# Altium PCB PCB1.PcbDoc (part 2 of 2)
Units mil, origin at the board's own origin, x right, y up, seen from the top; angles counter-clockwise.
Board outline 6000 x 4000 mil, 2 copper layers (Top Layer, Bottom Layer); 288 components, 201 nets, 886 pads, 6 vias.
Unrouted connection lines stored in the file: 611.
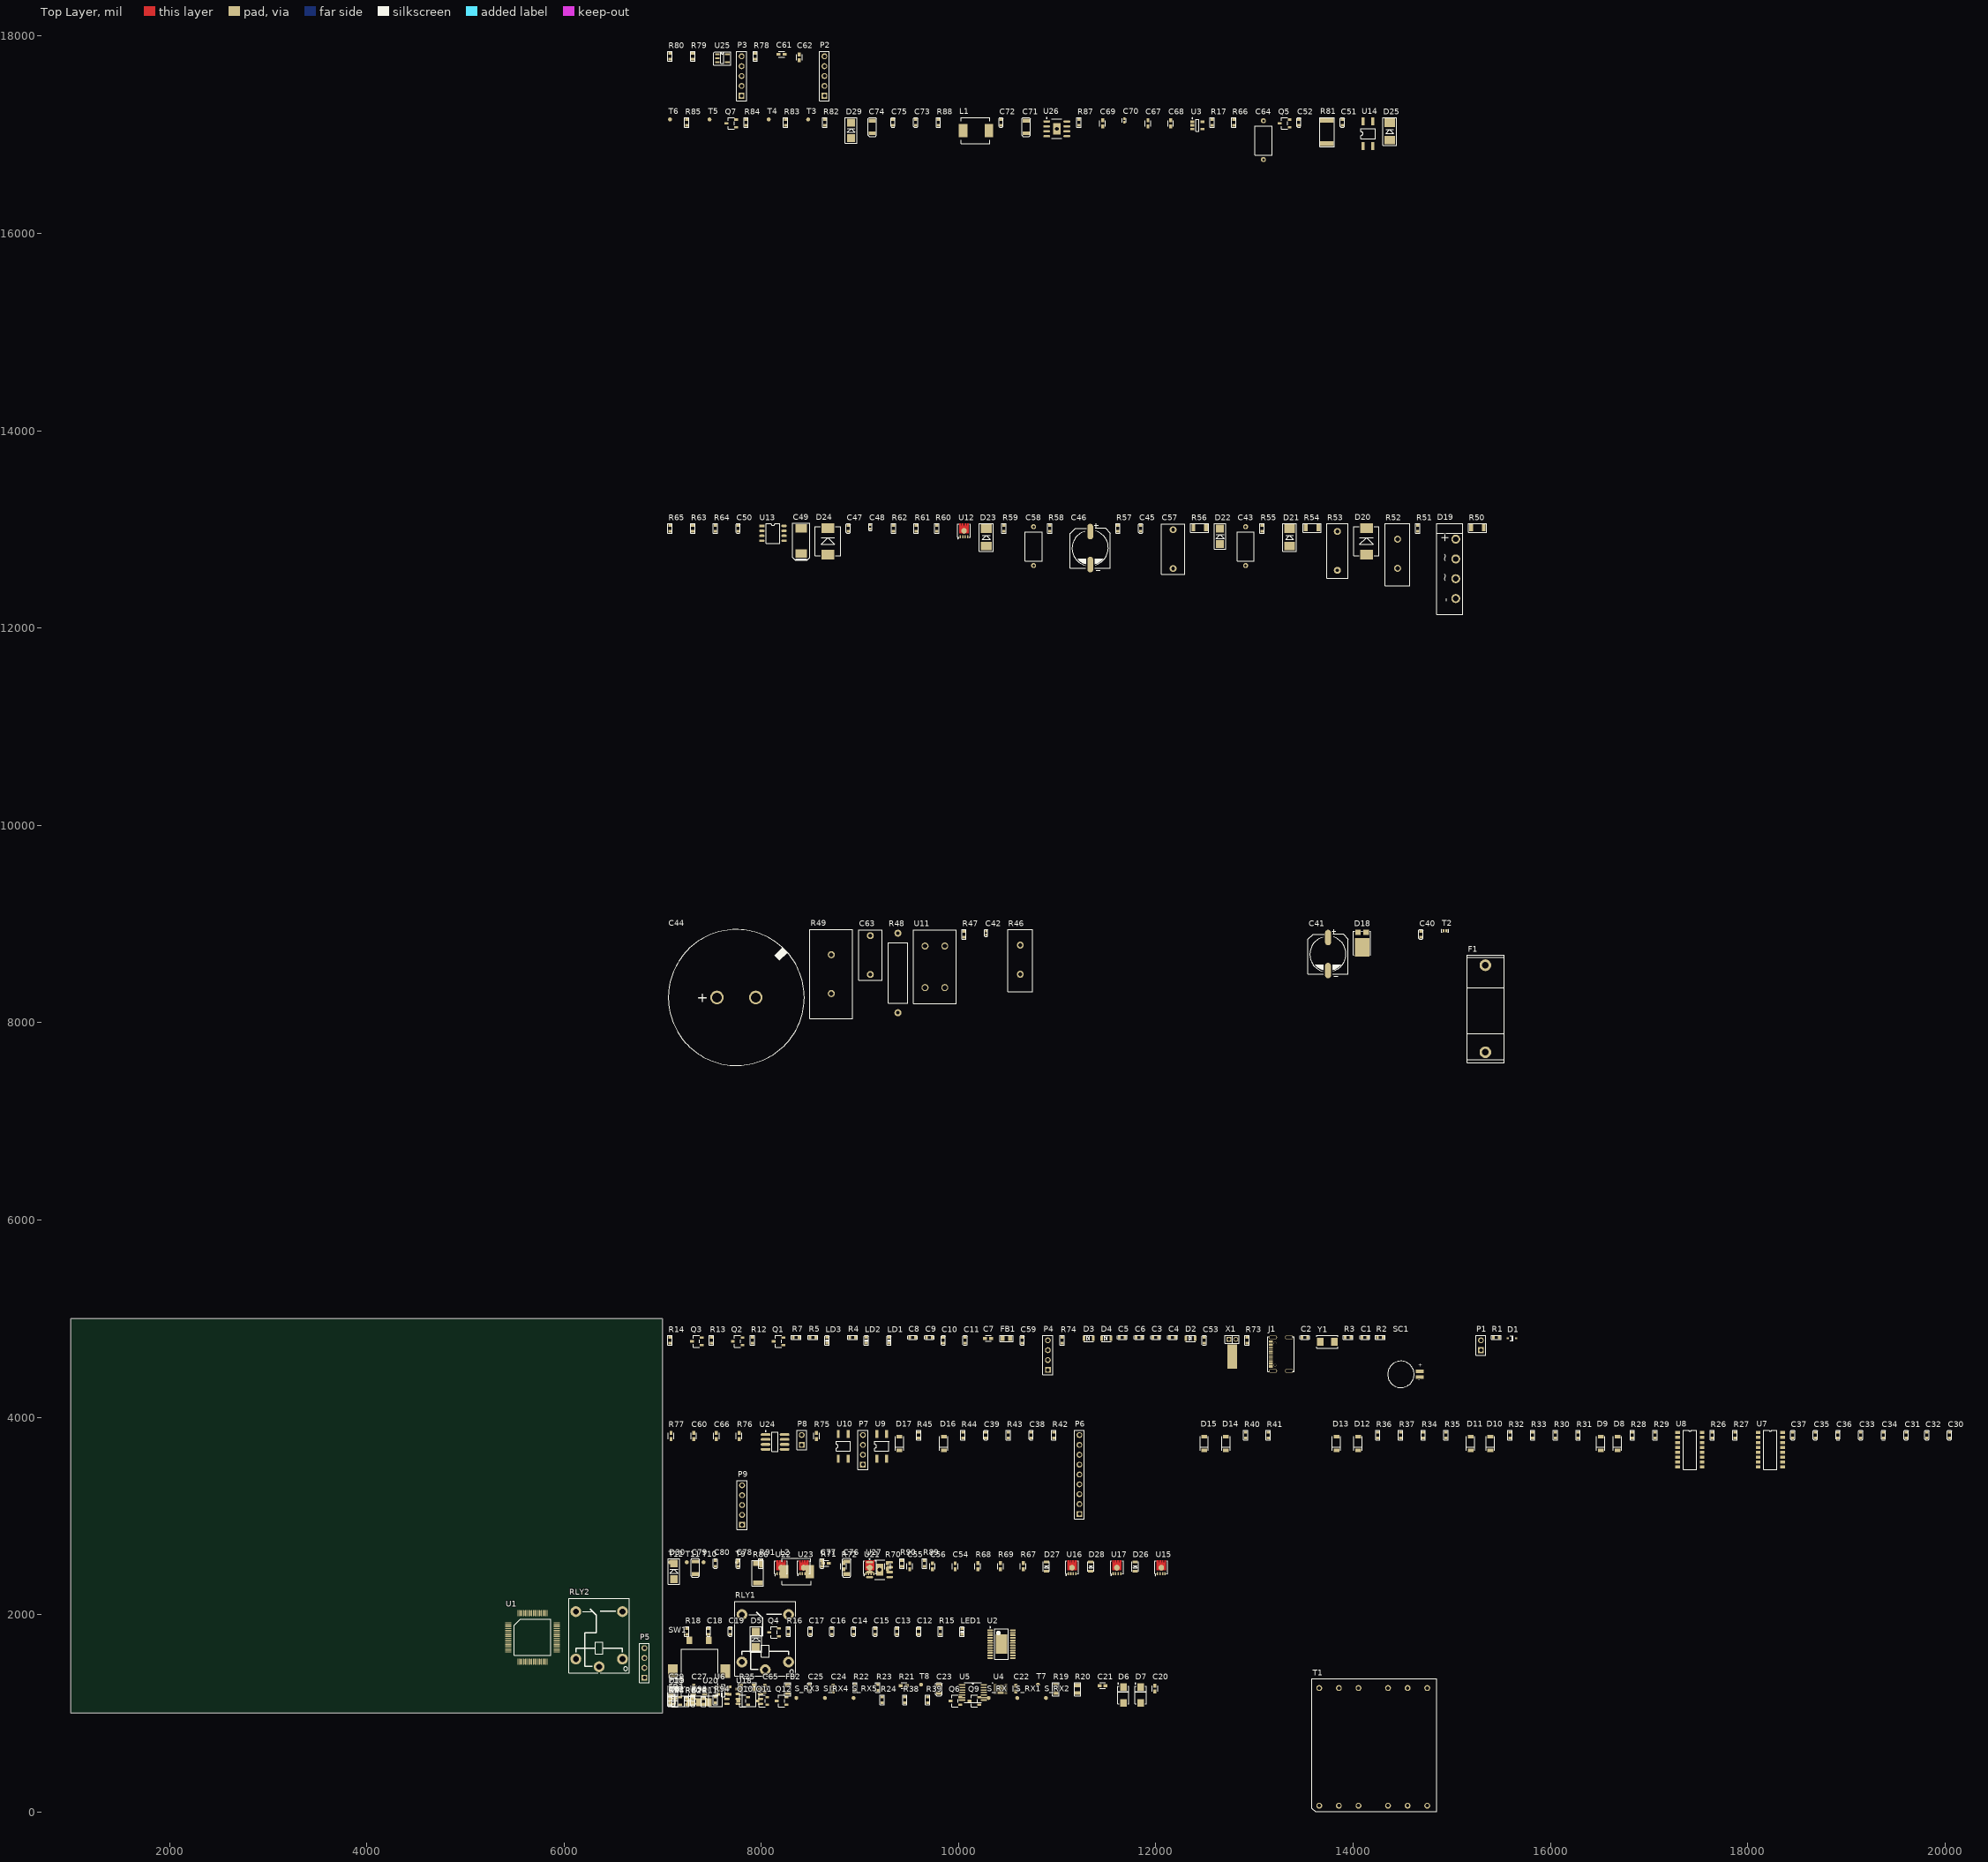
[diagram p0: Top Layer view]

## Via types
v1: diameter 24, hole 12, Top Layer to Bottom Layer, 4 vias
v2: diameter 59.06, hole 39.37, Top Layer to Bottom Layer, 2 vias

## Nets (pads, with @x,y where several pads share a name; then routed paths per layer and width w, separated by ;. In a path a pad name is that pad's centre, name@x,y a point inside that pad or via, vN(x,y) a via of type N, cw(c..) or ccw(c..) an arc to the next point about the centre after c; other vN are vias at no path point) (continued)
NetC40_1: C40.1 C41.1 D18.3 R61.1 R64.1 T2.1
NetC42_1: C42.1 C44.1 D19.1 R47.2 R50.2 T1.1
NetC42_2: C42.2 R51.2
NetC45_1: C45.1 C49.1 D21.2 R56.1 U13.6
NetC46_1: C46.1 D22.2 R55.1 R57.1
NetC47_1: C47.1 U13.1
NetC48_1: C48.1 D24.2 R61.2 R63.1
NetC50_1: C50.1 U13.2 U14.4
NetC51_1: C51.1 D25.2 R62.2 U13.3
NetC52_1: C52.1 Q5.2 R65.2 U14.2
NetC52_2: C52.2 Q5.1 R64.2 R66.1
NetC53_2: C53.2 R73.2 U1.12
NetC54_2: C54.2 D26.2 U18.8
NetC55_2: C55.2 D27.2 U19.8
NetC56_2: C56.2 D28.2 U20.8
NetC63_1: C63.1 P10.1 R48.2 R49.1 R52.1 U11.2
NetC63_2: C63.2 F1.2 R46.2 R48.1 R49.2 U11.1
NetC69_2: C69.2 C70.2
NetC72_1: C72.1 D29.2 L1.1 U26.8
NetC72_2: C72.2 U26.1
NetC77_1: C77.1 D30.2 L2.1 U27.8
NetC77_2: C77.2 U27.1
NetD1_2: D1.2 R1.1
NetD6_2: D6.2 D7.1
NetD14_1: D14.1 U7.8
NetD18_1: D18.1 D18.2 T1.10 T1.11 T1.12
NetD20_1: D20.1 T1.3 U12.5
NetD20_2: D20.2 R47.1 R51.1
NetD21_1: D21.1 R55.2
NetD22_1: D22.1 R58.1 T1.6
NetD23_1: D23.1 R60.1 U12.4
NetD23_2: D23.2 R60.2 U13.5
NetD25_1: D25.1 R57.2 U13.8
NetF1_1: F1.1 P10.2
NetLD1_2: LD1.2 R4.1
NetLD2_2: LD2.2 R5.1
NetLD3_2: LD3.2 R7.1
NetLED1_1: LED1.1 R15.2
NetLED1_2: LED1.2 U2.3
NetP1_1: P1.1 R2.2
NetQ1_1: Q1.1 R12.2
NetQ1_3: Q1.3 R4.2
NetQ2_1: Q2.1 R13.2
NetQ2_3: Q2.3 R5.2
NetQ3_1: Q3.1 R14.2
NetQ3_3: Q3.3 R7.2
NetQ7_1: Q7.1 R84.2 R85.1
NetR1_2: R1.2 SC1.1 U1.1
NetR8_2: R8.2 R11.1 SW1.A
NetR9_2: R9.2 R10.1 SW1.B
NetR15_1: R15.1 U2.2
NetR16_1: R16.1 U2.13
NetR17_1: R17.1 R87.2 U26.4
NetR19_1: R19.1 R20.2
NetR26_1: R26.1 U7.1
NetR28_1: R28.1 U8.1
NetR30_1: R30.1 U7.3
NetR32_1: R32.1 U8.3
NetR34_1: R34.1 U7.5
NetR36_1: R36.1 U8.5
NetR40_1: R40.1 U8.7
NetR44_1: R44.1 U9.1
NetR45_1: R45.1 U10.1
NetR46_1: R46.1 R52.2 R53.2
NetR50_1: R50.1 R54.2
NetR54_1: R54.1 R56.2
NetR58_2: R58.2 R59.1 U13.7
NetR62_1: R62.1 R81.1 U12.1 U12.2 U12.3
NetR63_2: R63.2 R65.1 U14.1
NetR67_1: R67.1 U18.7
NetR67_2: R67.2 U15.4
NetR68_1: R68.1 U19.7
NetR68_2: R68.2 U16.4
NetR69_1: R69.1 U20.7
NetR69_2: R69.2 U17.4
NetR70_1: R70.1 U18.5
NetR70_2: R70.2 U21.4
NetR71_1: R71.1 U19.5
NetR71_2: R71.2 U22.4
NetR72_1: R72.1 U20.5
NetR72_2: R72.2 U23.4
NetR78_2: R78.2 R79.1 U25.4
NetR80_1: R80.1 U25.3
NetR83_2: R83.2 R84.1
NetR88_1: R88.1 U26.5
NetR89_1: R89.1 R90.2 U27.4
NetR91_1: R91.1 U27.5
op_3.3v: C65.1 FB2.2 U5.4
osc_in: C5.1 U1.3 X1.2
osc_out: C6.1 U1.4 X1.1
PGND: C43.1 C44.2 C45.2 C46.2 C47.2 C49.2 C50.2 C51.2 C58.2 C64.2 D19.4 R59.2 R81.2 T1.5 U13.4 U14.3
relay_A1: P7.1 RLY2.5
relay_A2: P7.3 RLY1.5
relay_B1: P7.2 RLY2.2
relay_B2: P7.4 RLY1.2
RS232RX/485-_N: P8.2 U24.7
RS232TX/485+_P: P8.1 U24.6
RUN: R14.1 U1.11
RX_5V: R75.1 R76.1 U24.1
SCLK_AO: U1.52 U2.8
SIOUT0: D5.2 P5.1
SWCLK: P4.2 U1.50
SWD: P4.4 U1.49
uart1_rx: R76.2 U1.23
uart1_tx: U1.43 U24.4
USB_N: D3.2 J1.A7 J1.B7 U1.45
USB_P: D4.2 J1.A6 J1.B6 U1.46
V_Power: C71.1 C73.2 C76.1 C78.2 D26.1 D27.1 D28.1 R88.2 R91.2 T2.2 T4.1 U15.5 U16.5 U17.5 U18.1 U19.1 U20.1 U26.7 U27.7
V_REF: C20.1 U4.1
VCC_5V: C27.1 C67.1 C68.1 C74.2 C75.1 L1.2 LD1.1 LD2.1 LD3.1 P2.1 P3.1 Q6.1 Q8.1 Q9.1 Q10.1 Q11.1 Q12.1 R87.1 T6.1 U3.1 U3.3 U6.1 U6.3
VCC_MCU_3.3V: R24.1 R38.1 R39.1 R92.1 R93.1 R94.1
VUSB: C3.2 C4.2 D2.2 J1.A4 J1.A9 J1.B4 J1.B9
WARN: R13.1 U1.20
pads on no net: C7.0 C20.0 C21.0 C22.0 C24.0 C27.0 C29.0 C54.0 C55.0 C56.0 C60.0 C61.0 C62.0 C65.0 C66.0 C67.0 C68.0 C69.0 C70.0 D14.2 J1.2 J1.A5 J1.A8 J1.B5 J1.B8 P6.8 P9.1 P9.2 R21.0 R67.0 R68.0 R69.0 R70.0 R71.0 R72.0 R75.0 R76.0 R77.0 RLY1.3 RLY2.3 SW1.A3 SW1.A4 T1.2 T1.4 U1.2 U2.6 U2.17 U2.18 U2.23 U2.25 U3.4 U5.1 U5.2 U5.3 U5.5 U5.6 U5.7 U5.12 U5.13 U5.14 U6.4 U7.7 U7.9 U7.10 U26.2 U26.3 U27.2 U27.3 X1.3

## Text inside footprints (layer, text, board x,y; h text height)
C44: Top Overlay "+" at 7345,8208.34 h100
D19: Top Overlay "-" at 14975,12265 h80 r90; Top Overlay "~" at 14967.9,12464.98 h80 r90; Top Overlay "~" at 14967.9,12664.98 h80 r90; Top Overlay "+" at 14969.7,12864.98 h80 r90
SC1: Top Overlay "+" at 14660.85,4513.7 h39.37; Top Overlay "-" at 14660.85,4366.1 h39.37